# Altium PCB PCB1.PcbDoc
Units mm, origin at the board's own origin, x right, y up, seen from the top; angles counter-clockwise.
Board outline 155.25 x 130.25 mm, 2 copper layers (Top Layer, Bottom Layer); 22 components, 34 nets, 227 pads, 0 vias.
Unrouted connection lines stored in the file: 59.
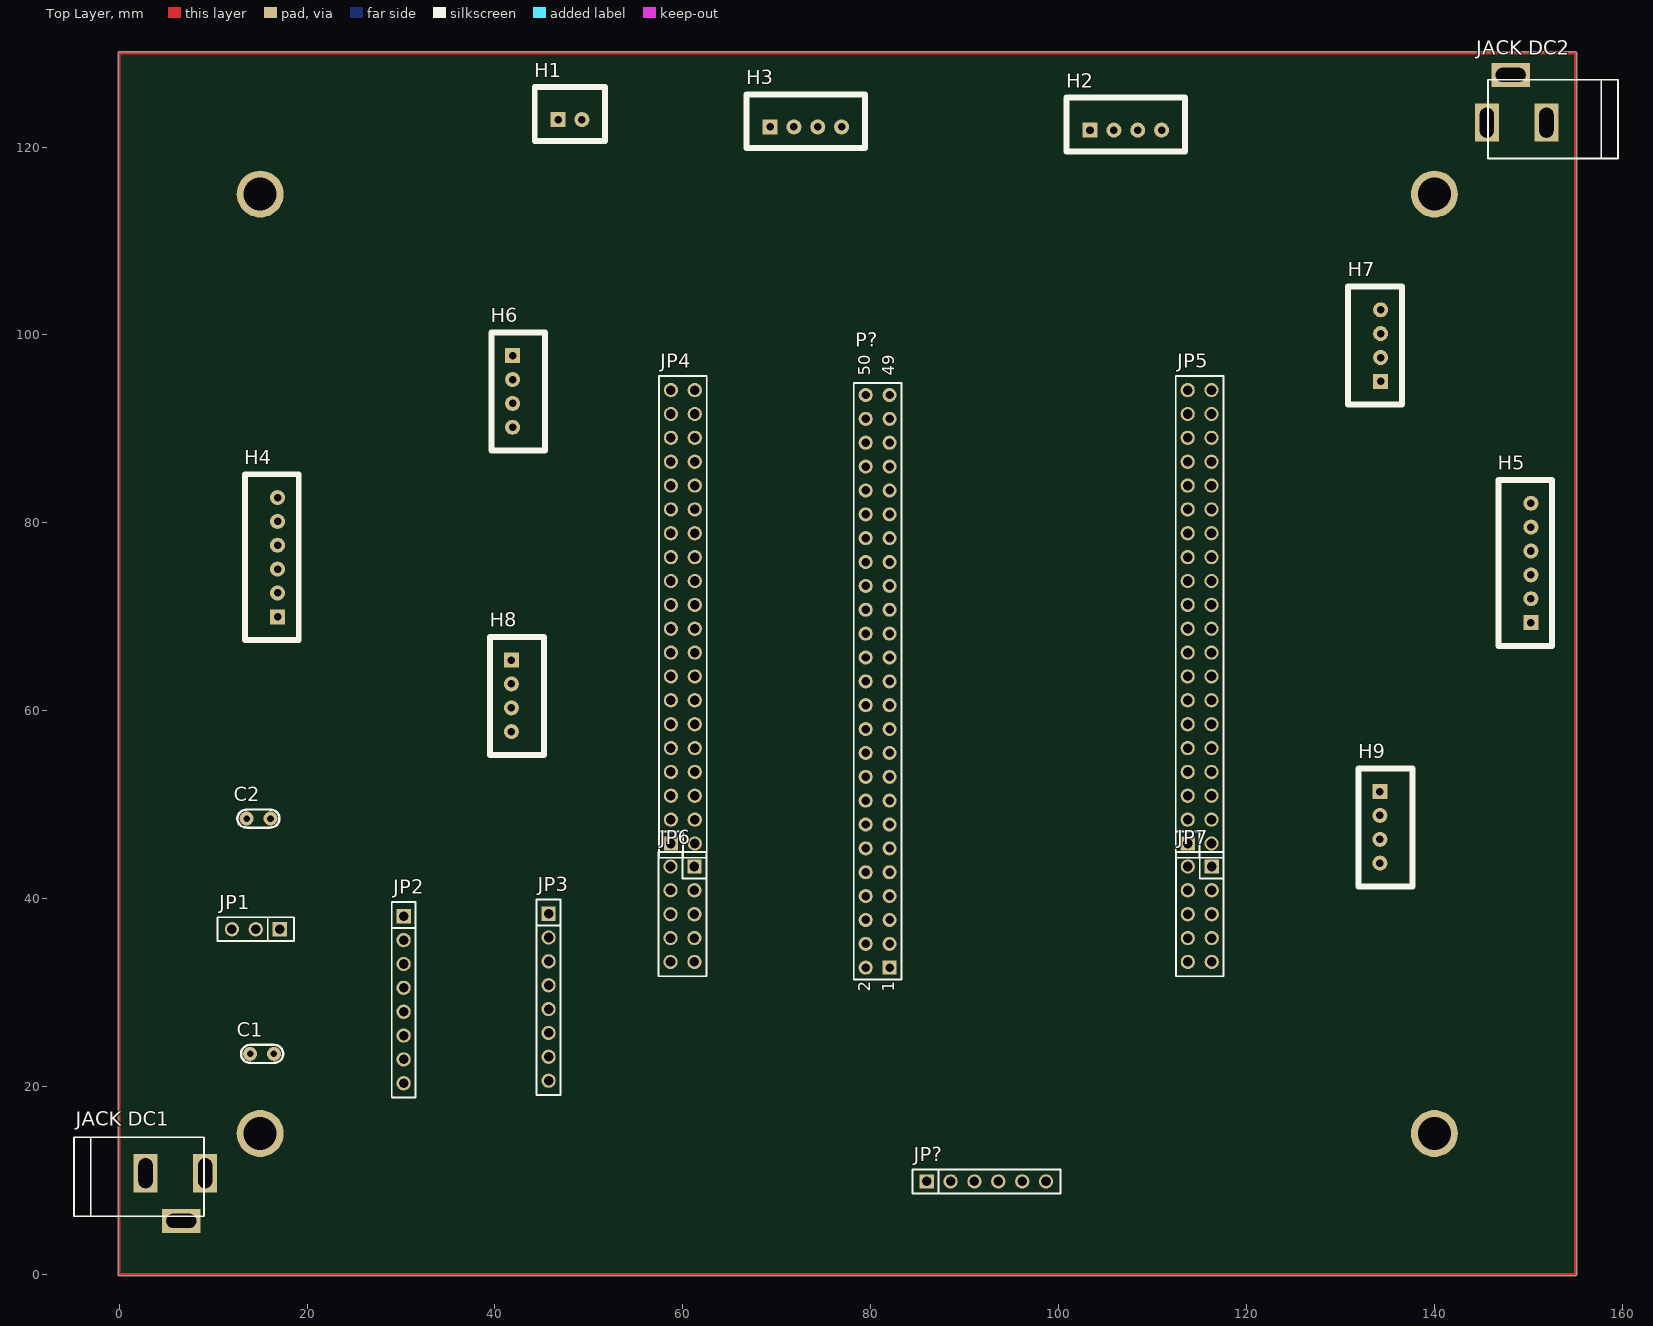
[diagram p0: Top Layer view]
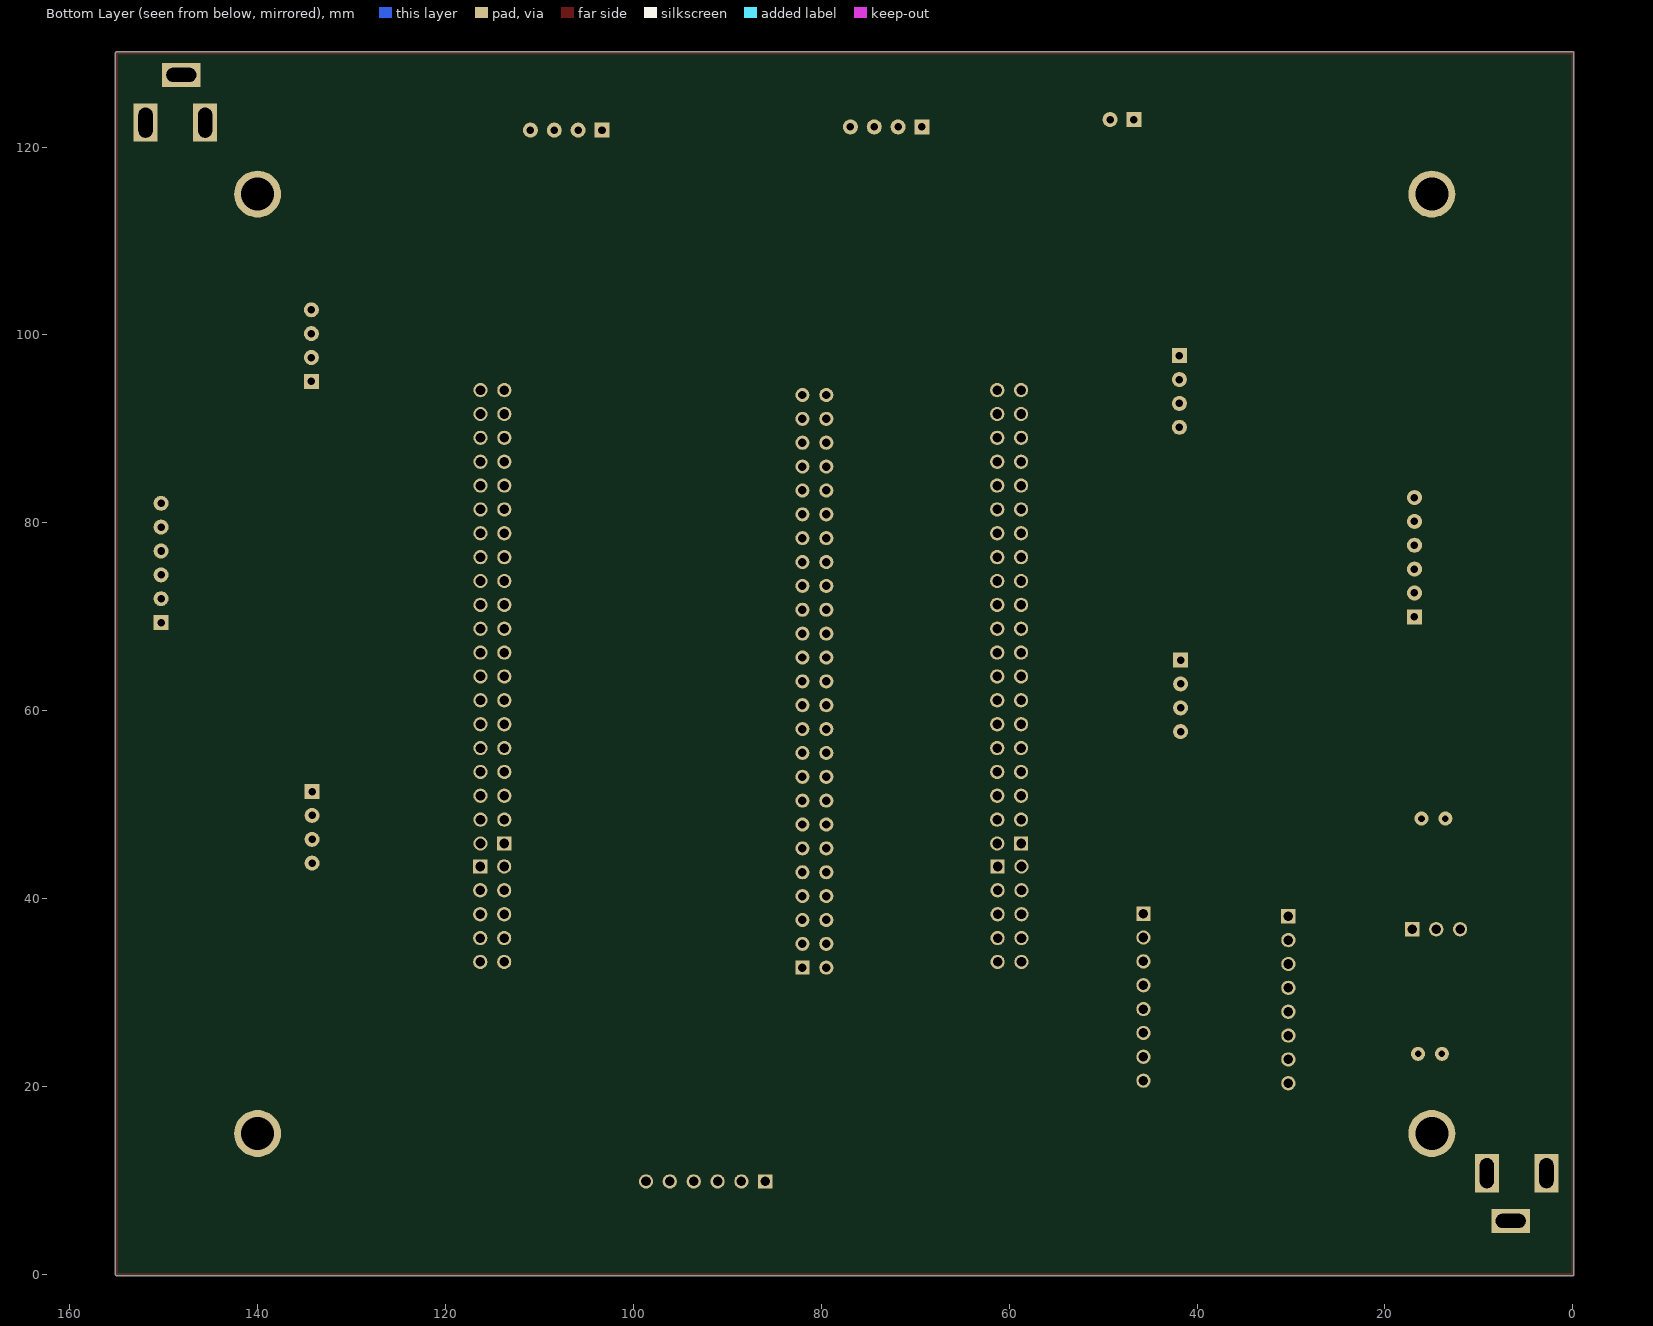
[diagram p1: Bottom Layer view, seen from below]

## Layer stack, top to bottom
Top Solder: solder mask 0.0102, Solder Resist, Dk 3.5
Top Layer: signal copper 0.0356
Dielectric 1: dielectric 0.32, FR-4, Dk 4.8
Bottom Layer: signal copper 0.0356
Bottom Solder: solder mask 0.0102, Solder Resist, Dk 3.5

## Board outline
-0.127,0 ccw(c0,0) 0,-0.127 155,-0.127 ccw(c155,0) 155.127,0 155.127,130 ccw(c155,130) 155,130.127 0,130.127 ccw(c0,130) -0.127,130

## Design rules (kind name [scope] priority, off if disabled: settings)
Clearance [All] p1: gap=0.254 ignorepadtopadclearanceinfootprint=FALSE except(0: Arc-Hole Track-Hole SMDPad-Hole THPad-Hole Via-Hole Fill-Hole Poly-Hole Region-Hole Text-Hole)
PolygonConnect [All] p1: connectstyle=Relief reliefconductorwidth=0.254 reliefentries=4 polygonreliefangle="90 Angle" airgapwidth=0.254
RoutingVias [All] p1: holewidth=0.711 width=1.27 viastyle="Through Hole" minholewidth=0.711 minwidth=1.27 maxholewidth=0.711 maxwidth=1.27
SolderMaskExpansion [All] p1: expansion=0.102 istentingtop=FALSE
Width [All] p1: maxlimit=1.016 minlimit=0.254 preferedwidth=0.508
30 further rules are at their usual default settings.

## Components (designator, comment, footprint, x,y, rotation, side; value= is the part's Value field where it differs from the comment)
C1 "221" "tu gom" 15.2,23.475 r180 top
C2 "221" "tu gom" 14.83,48.525 r0 top
H1 "Header 2P 2.54 Duc Thang" XH2.54M-2 46.71,122.925 r0 top
H2 "Header 4P 2.54 Duc Thang" XH2.54M-4 103.335,121.8 r0 top
H3 "Header 4P 2.54 Duc Thang" XH2.54M-4 69.275,122.15 r0 top
H4 "Header 6P 2.54 Duc Thang" XH2.54M-6 16.85,69.995 r90 top
H5 "Header 6P 2.54 Duc Thang" XH2.54M-6 150.275,69.385 r90 top
H6 "Header 4P 2.54 Duc Thang" XH2.54M-4 41.875,97.795 r270 top
H7 "Header 4P 2.54 Duc Thang" XH2.54M-4 134.275,95.06 r90 top
H8 "Header 4P 2.54 Duc Thang" XH2.54M-4 41.75,65.39 r270 top
H9 "Header 4P 2.54 Duc Thang" XH2.54M-4 134.2,51.395 r270 top
"JACK DC1" "JACK DC 12V" "JACK DC 5.5" 5.975,8.235 r0 top value="Jac DC"
"JACK DC2" "JACK DC 5.5" "JACK DC 5.5" 148.75,125.14 r180 top value="Jac DC"
JP1 "JP 1x3 2.54" "JP 1x3 CT" 17.08,36.75 r180 top
JP2 "JP 1x8 2.54" "JP 1x8 CT" 30.275,38.125 r270 top
JP3 "JP 1x8 2.54" "JP 1x8 CT" 45.7,38.405 r270 top
JP4 "JP 2x20 2.54" "JP 2x20 CT" 60,70 r90 top
JP5 "JP 2x20 2.54" "JP 2x20 CT" 115,70 r90 top
JP6 "JP 2x5 2.54" "JP 2x5 CT" 59.955,38.345 r270 top
JP7 "JP 2x5 2.54" "JP 2x5 CT" 115.02,38.345 r270 top
JP? "JP 1x6 2.54" "JP 1x6 CT" 85.955,9.9 r0 top
P? "Header 25X2" HDR2X25 82,32.65 r90 top

## Footprints (in the part's own frame and the unit in brackets; to place one, negate y for a bottom-side part, rotate by r counter-clockwise, add the part's x,y. Pads: shape width x height; smd on the part's side, far side on the other; paste and mask are expansions set on the pad)
HDR2X25 [mm] "Connector; Header; 25x2 Position"
  rect 1.5x1.5 hole 0.9: 1(0,0)
  round 1.5 hole 0.9: 2(0,2.54) 3(2.54,0) 4(2.54,2.54) 5(5.08,0) 6(5.08,2.54) 7(7.62,0) 8(7.62,2.54) 9(10.16,0) 10(10.16,2.54) 11(12.7,0) 12(12.7,2.54) 13(15.24,0) 14(15.24,2.54) 15(17.78,0) 16(17.78,2.54) 17(20.32,0) 18(20.32,2.54) 19(22.86,0) 20(22.86,2.54) 21(25.4,0) 22(25.4,2.54) 23(27.94,0) 24(27.94,2.54) 25(30.48,0) 26(30.48,2.54) 27(33.02,0) 28(33.02,2.54) 29(35.56,0) 30(35.56,2.54) 31(38.1,0) 32(38.1,2.54) 33(40.64,0) 34(40.64,2.54) 35(43.18,0) 36(43.18,2.54) 37(45.72,0) 38(45.72,2.54) 39(48.26,0) 40(48.26,2.54) 41(50.8,0) 42(50.8,2.54) 43(53.34,0) 44(53.34,2.54) 45(55.88,0) 46(55.88,2.54) 47(58.42,0) 48(58.42,2.54) 49(60.96,0) 50(60.96,2.54)
  silkscreen extent -1.27,-1.27 62.23,3.81
"JACK DC 5.5" [mm] "Jac DC input"
  rect 2.54x4.064 hole 1.5 slot 3.2 at 90 deg: 1(3.175,2.54) 2(-3.175,2.54)
  rect 4.064x2.54 hole 1.5 slot 3.2 at 0 deg: 3(0.635,-2.54)
  silkscreen extent -10.79,-2.03 3.05,6.35, body extent -10.42,-2.67 3.4,6.84, height 11.02
"JP 1x3 CT" [mm]
  rect 1.52x1.52 hole 1.02: 1(0,0)
  round 1.52 hole 1.02: 2(2.54,0) 3(5.08,0)
  silkscreen extent -1.52,-1.27 6.6,1.27, body extent -1.52,-1.25 6.6,1.25, height 8.51
"JP 1x6 CT" [mm] "6 row, straight, gold plating"
  rect 1.52x1.52 hole 1.02: 1(0,0)
  round 1.52 hole 1.02: 2(2.54,0) 3(5.08,0) 4(7.62,0) 5(10.16,0) 6(12.7,0)
  silkscreen extent -1.52,-1.27 14.22,1.27, body extent -1.52,-1.25 14.22,1.25, height 8.51
"JP 1x8 CT" [mm] "8 row, straight, gold plating"
  rect 1.52x1.52 hole 1.02: 1(0,0)
  round 1.52 hole 1.02: 2(2.54,0) 3(5.08,0) 4(7.62,0) 5(10.16,0) 6(12.7,0) 7(15.24,0) 8(17.78,0)
  silkscreen extent -1.52,-1.27 19.3,1.27, body extent -1.52,-1.25 19.3,1.25, height 8.51
"JP 2x5 CT" [mm] "10 pins, dual row, straight, gold plating"
  rect 1.52x1.52 hole 1.02: 1(-5.08,1.27)
  round 1.52 hole 1.02: 2(-2.54,1.27) 3(0,1.27) 4(2.54,1.27) 5(5.08,1.27) 6(5.08,-1.27) 7(2.54,-1.27) 8(0,-1.27) 9(-2.54,-1.27) 10(-5.08,-1.27)
  silkscreen extent -6.6,-2.54 6.6,2.54, body extent -6.6,-2.54 6.6,2.54, height 8.51
"JP 2x20 CT" [mm] "40 pins, dual row, straight, gold plating"
  rect 1.52x1.52 hole 1.02: 1(-24.13,1.27)
  round 1.52 hole 1.02: 2(-21.59,1.27) 3(-19.05,1.27) 4(-16.51,1.27) 5(-13.97,1.27) 6(-11.43,1.27) 7(-8.89,1.27) 8(-6.35,1.27) 9(-3.81,1.27) 10(-1.27,1.27) 11(1.27,1.27) 12(3.81,1.27) 13(6.35,1.27) 14(8.89,1.27) 15(11.43,1.27) 16(13.97,1.27) 17(16.51,1.27) 18(19.05,1.27) 19(21.59,1.27) 20(24.13,1.27) 21(24.13,-1.27) 22(21.59,-1.27) 23(19.05,-1.27) 24(16.51,-1.27) 25(13.97,-1.27) 26(11.43,-1.27) 27(8.89,-1.27) 28(6.35,-1.27) 29(3.81,-1.27) 30(1.27,-1.27) 31(-1.27,-1.27) 32(-3.81,-1.27) 33(-6.35,-1.27) 34(-8.89,-1.27) 35(-11.43,-1.27) 36(-13.97,-1.27) 37(-16.51,-1.27) 38(-19.05,-1.27) 39(-21.59,-1.27) 40(-24.13,-1.27)
  silkscreen extent -25.65,-2.54 25.65,2.54, body extent -25.65,-2.54 25.65,2.54, height 8.51
"tu gom" [mm] "Tu gom mini"
  round 1.5 hole 0.7: 1(-1.27,0) 2(1.27,0)
  silkscreen extent -2.25,-0.97 2.22,0.97, body extent -2.92,-0.85 2.92,0.85, height 6.12
XH2.54M-2 [mm]
  rect 1.6x1.6 hole 0.8: 1(0,0)
  round 1.6 hole 0.8: 2(2.54,0)
  silkscreen extent -2.48,-2.26 5.02,3.46, body extent -2.48,-2.26 5.02,3.48, height 6.91
XH2.54M-4 [mm]
  rect 1.6x1.6 hole 0.8: 1(0,0)
  round 1.6 hole 0.8: 2(2.54,0) 3(5.08,0) 4(7.62,0)
  silkscreen extent -2.48,-2.26 10.1,3.46, body extent -2.48,-2.26 10.1,3.48, height 6.91
XH2.54M-6 [mm]
  rect 1.6x1.6 hole 0.8: 1(0,0)
  round 1.6 hole 0.8: 2(2.54,0) 3(5.08,0) 4(7.62,0) 5(10.16,0) 6(12.7,0)
  silkscreen extent -2.48,-2.26 15.18,3.46, body extent -2.48,-2.26 15.18,3.48, height 6.91

## Part data
C1 C2: library part "Tu gom 221 50V", "Cắm", Chung_Loai=Cắm, Don_Vi=Con, Ma_Hang=MH004769, So_Chan=2, Ten_Linh_Kien="Tụ gốm 220P 221 50V"
H1 H2 H3 H4 H5 H6 H7 H8 H9: "Cắm", Chung_Loai=Cắm, Don_Vi=Con
  H1: Ma_Hang=MH001283, Ten_Linh_Kien="Header 2P XH2.54-2P Đực Thẳng"
  H2 H3 H6 H7 H8 H9: Ma_Hang=MH001285, Ten_Linh_Kien="Header 4P XH2.54-4P Đực Thẳng"
  H4 H5: Ma_Hang=MH001972, Ten_Linh_Kien="Header 6P XH2.54-6P Đực Thẳng"
"JACK DC1": library part "JACK DC 5.5", "JACK DC 5.5"
JP1: library part "JP 1x3 2.54 Cai Thang", "Cắm", Chung_Loai=Cắm, Don_Vi=Con, Ma_Hang=MH004006, Ten_Linh_Kien="Jump Đơn Cái 2.54MM 1x20P Thẳng"
JP2 JP3: library part "JP 1x8 2.54 Cai Thang", "Cắm", Chung_Loai=Cắm, Don_Vi=Con, Ma_Hang=MH004006, Ten_Linh_Kien="Jump Đơn Cái 2.54MM 1x20P Thẳng"
JP4 JP5: library part "JP 2x20 2.54 Cai Thang", "Cắm", Chung_Loai=Cắm, Don_Vi=Con, Ma_Hang=MH008647, Ten_Linh_Kien="Jump Đôi Cái 2.54MM 2x20P Thẳng"
JP6 JP7: library part "JP 2x5 2.54 Cai Thang", "Cắm", Chung_Loai=Cắm, Don_Vi=Con, Ma_Hang=MH008647, Ten_Linh_Kien="Jump Đôi Cái 2.54MM 2x20P Thẳng"
JP?: library part "JP 1x6 2.54 Cai Thang", "Cắm", Chung_Loai=Cắm, Don_Vi=Con, Ma_Hang=MH004006, Ten_Linh_Kien="Jump Đơn Cái 2.54MM 1x20P Thẳng"
P?: "Header, 25-Pin, Dual row", LatestRevisionDate=17-Jul-2002, LatestRevisionNote="Re-released for DXP Platform.", Publisher="Altium Limited"

## Free pads (board coordinates)
  round 5 hole 3.5: 8(15,15) 8(15,115) 8(140,15) 8(140,115)

## Nets (pads, with @x,y where several pads share a name; then routed paths per layer and width w, separated by ;. In a path a pad name is that pad's centre, name@x,y a point inside that pad or via, vN(x,y) a via of type N, cw(c..) or ccw(c..) an arc to the next point about the centre after c; other vN are vias at no path point)
5V: "JACK DC2.1" H2.4 H3.4 H4.2 H5.2 H6.4 H7.4 H8.4 H9.4 JP5.22
5V_HA: C2.1 JP1.3 JP2.2
12V: "JACK DC1.1" C1.1 JP1.1 JP2.1
ENA1_E9: H4.3 JP4.7
ENA2_C6: H5.4 JP7.7
ENB1_E11: H4.4 JP4.6
ENB2_C7: H5.3 JP7.4
GND: "JACK DC2.2" "JACK DC2.3" H2.1 H3.1 H4.5 H5.5 H6.1 H7.1 H8.1 H9.1 JP5.21
GND_CL: "JACK DC1.2" "JACK DC1.3" C1.2 C2.2 JP1.2 JP2.8 JP3.8
L1: JP3.3 JP5.8
L2: JP3.2 JP5.9
ML+: H4.1 JP2.4
ML-: H4.6 JP2.5
MR+: H5.1 JP2.6
MR-: H5.6 JP2.7
PWM_L: JP3.1 JP4.3
PWM_R: JP3.7 JP4.37
R1: JP3.5 JP5.7
R2: JP3.6 JP5.6
RT_A2: H1.2 JP4.27
RX_A3: H1.1 JP4.14
STBY: JP3.4 JP4.33
T3_CH1_A6: H3.2 JP4.29
T3_CH2_A7: H6.2 JP4.12
T3_CH3_B0: H2.2 JP4.31
T3_CH4_B1: H8.2 JP4.10
T4_CH2_B7: H9.2 JP5.32
T4_CH3_B8: H7.2 JP5.11
Trig_T3_CH1_E0: H3.3 JP5.12
Trig_T3_CH2_D13: H6.3 JP6.8
Trig_T3_CH3_E4: H2.3 JP5.14
Trig_T3_CH4_D15: H8.3 JP6.7
Trig_T4_CH2_B3: H9.3 JP5.34
Trig_T4_CH3_B5: H7.3 JP5.33
pads on no net: JP2.3 JP4.1 JP4.2 JP4.4 JP4.5 JP4.8 JP4.9 JP4.11 JP4.13 JP4.15 JP4.16 JP4.17 JP4.18 JP4.19 JP4.20 JP4.21 JP4.22 JP4.23 JP4.24 JP4.25 JP4.26 JP4.28 JP4.30 JP4.32 JP4.34 JP4.35 JP4.36 JP4.38 JP4.39 JP4.40 JP5.1 JP5.2 JP5.3 JP5.4 JP5.5 JP5.10 JP5.13 JP5.15 JP5.16 JP5.17 JP5.18 JP5.19 JP5.20 JP5.23 JP5.24 JP5.25 JP5.26 JP5.27 JP5.28 JP5.29 JP5.30 JP5.31 JP5.35 JP5.36 JP5.37 JP5.38 JP5.39 JP5.40 JP6.1 JP6.2 JP6.3 JP6.4 JP6.5 JP6.6 JP6.9 JP6.10 JP7.1 JP7.2 JP7.3 JP7.5 JP7.6 JP7.8 JP7.9 JP7.10 JP?.1 JP?.2 JP?.3 JP?.4 JP?.5 JP?.6 P?.1 P?.2 P?.3 P?.4 P?.5 P?.6 P?.7 P?.8 P?.9 P?.10 P?.11 P?.12 P?.13 P?.14 P?.15 P?.16 P?.17 P?.18 P?.19 P?.20 P?.21 P?.22 P?.23 P?.24 P?.25 P?.26 P?.27 P?.28 P?.29 P?.30 P?.31 P?.32 P?.33 P?.34 P?.35 P?.36 P?.37 P?.38 P?.39 P?.40 P?.41 P?.42 P?.43 P?.44 P?.45 P?.46 P?.47 P?.48 P?.49 P?.50
copper on no net: | length 690
  Top Layer w0.254: 0,120 0,0 ; 0,0 0,130 155,130 155,0 0,0

## Text inside footprints (layer, text, board x,y; h text height)
P?: Top Overlay "2" at 79.968,30.11 h1.27 r90; Top Overlay "1" at 82.508,30.11 h1.27 r90; Top Overlay "49" at 82.508,95.642 h1.27 r90; Top Overlay "50" at 79.968,95.642 h1.27 r90